# Altium PCB PCB1.PcbDoc
Units mil, origin at the board's own origin, x right, y up, seen from the top; angles counter-clockwise.
Board outline 1385 x 836.9 mil, 2 copper layers (Top Layer, Bottom Layer); 22 components, 18 nets, 80 pads, 80 vias.
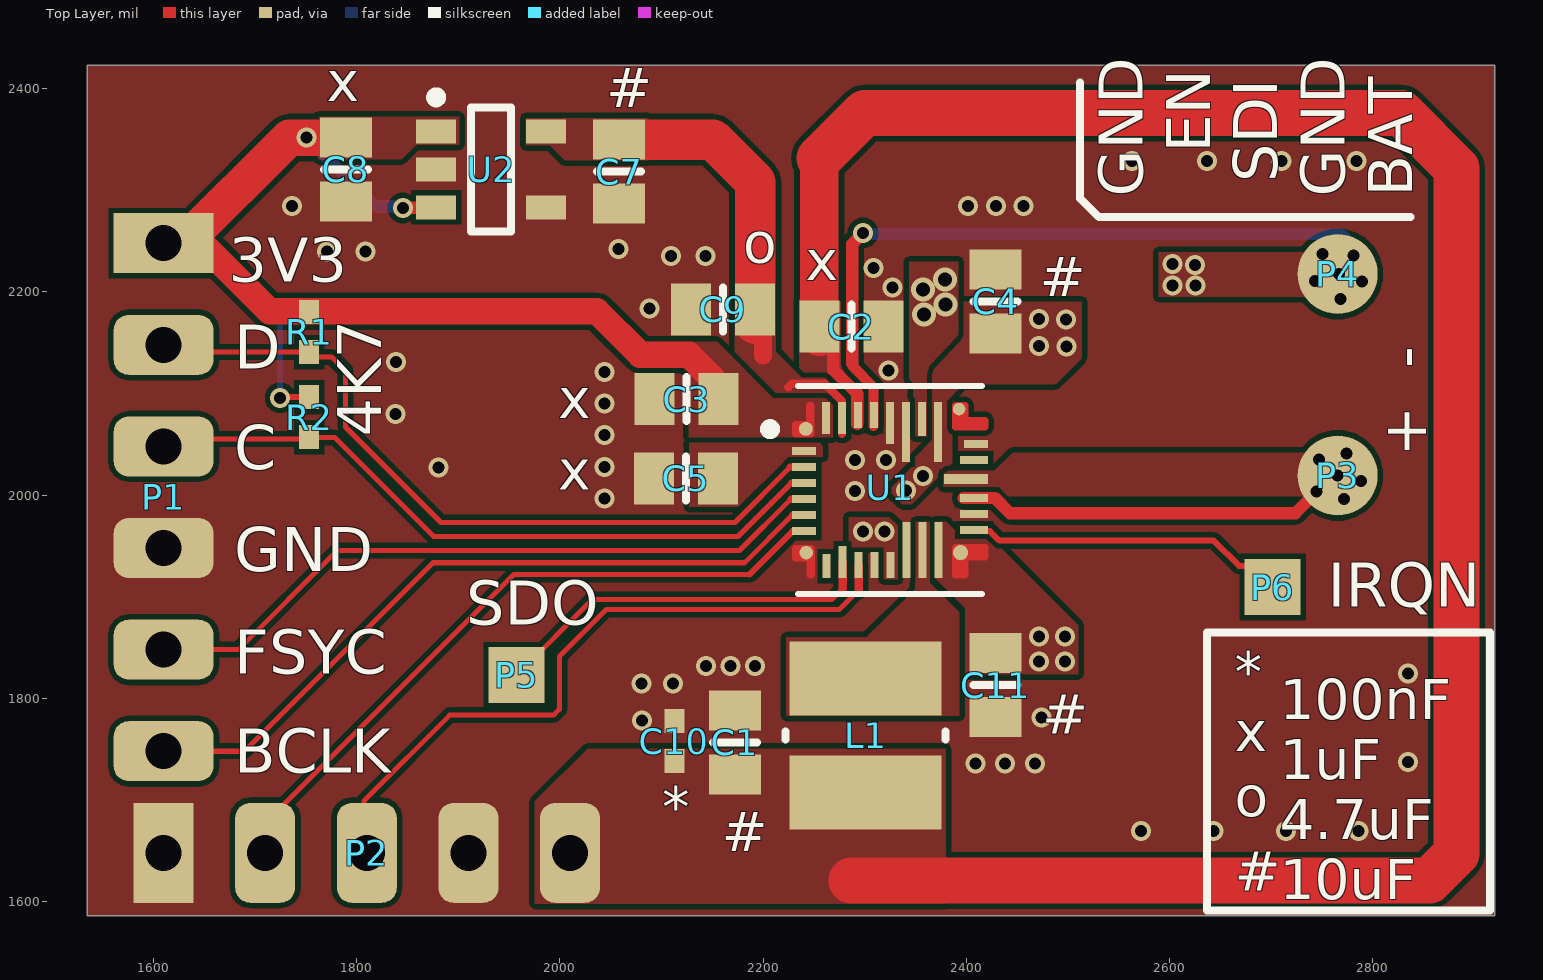
[diagram p0: Top Layer view]
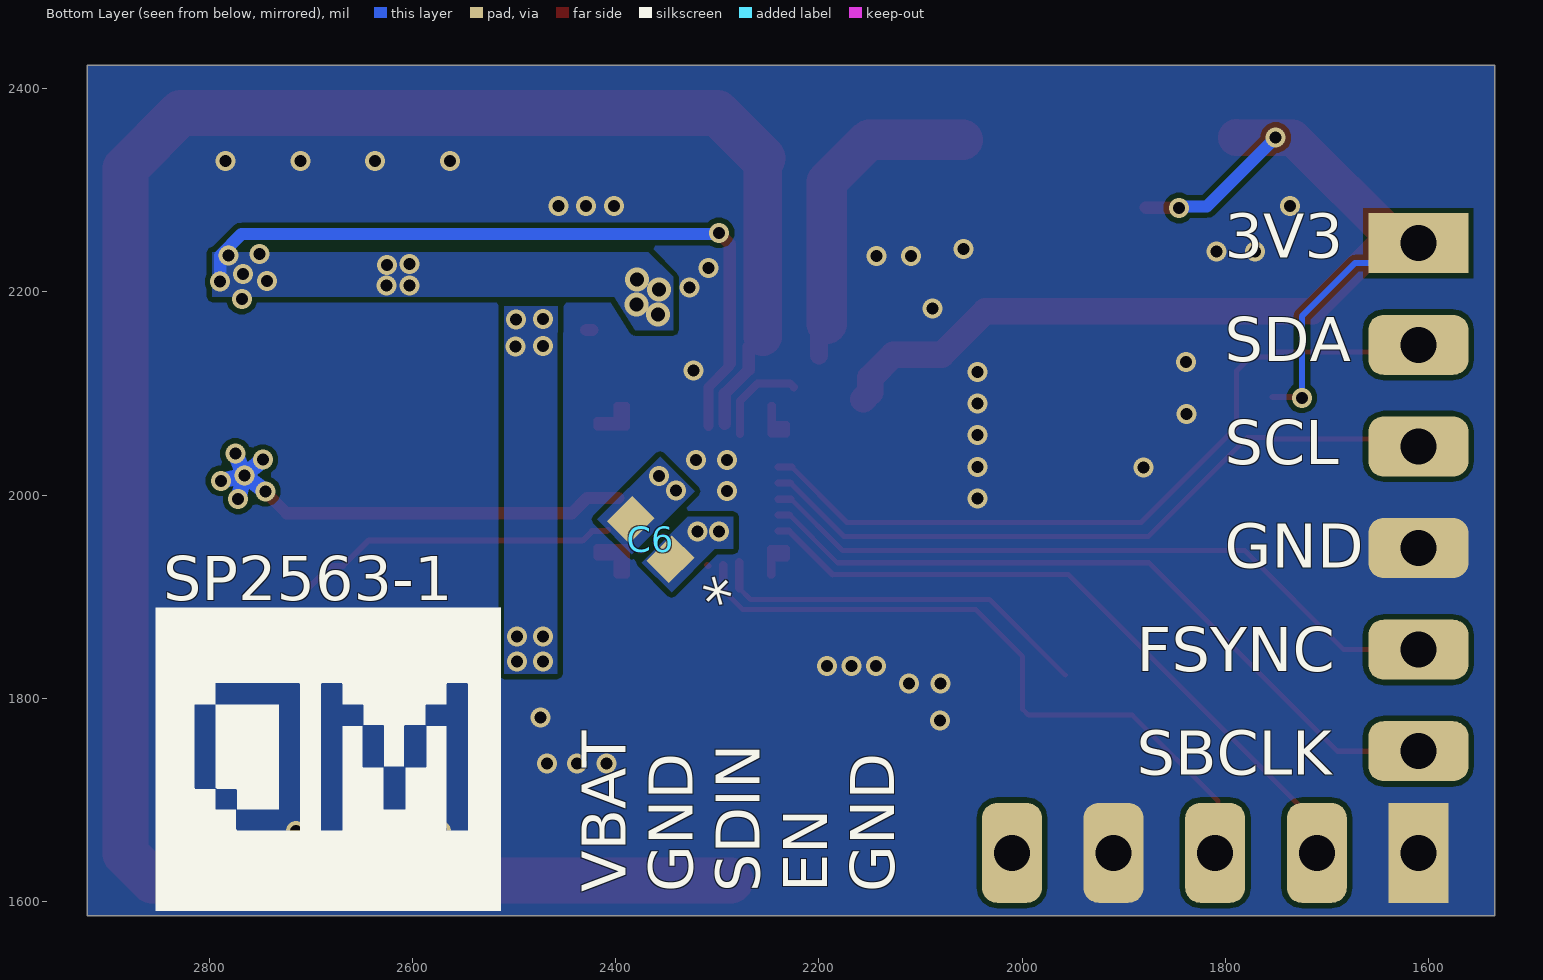
[diagram p1: Bottom Layer view, seen from below]

## Layer stack, top to bottom
Top Solder: solder mask 0.4, Solder Resist, Dk 3.5
Top Layer: signal copper 1.4
Dielectric 1: dielectric 12.6, FR-4, Dk 4.8
Bottom Layer: signal copper 1.4
Bottom Solder: solder mask 0.4, Solder Resist, Dk 3.5

## Board outline
1535,1586.1 2920,1586.1 2920,2423 1535,2423

## Design rules (kind name [scope] priority, off if disabled: settings)
Clearance [All] p1: gap=5 ignorepadtopadclearanceinfootprint=TRUE
PolygonConnect [All] p1: connectstyle=Direct reliefconductorwidth=10 reliefentries=4 polygonreliefangle="90 Angle" airgapwidth=10
RoutingVias [All] p1: holewidth=11.81 width=19.68 viastyle="Through Hole" minholewidth=11.81 minwidth=19.68 maxholewidth=67.36 maxwidth=393.7
SolderMaskExpansion [All] p1: expansion=4 istentingtop=FALSE
Width [All] p1: maxlimit=100 minlimit=5 preferedwidth=5
30 further rules are at their usual default settings.

## Components (designator, comment, footprint, x,y, rotation, side; value= is the part's Value field where it differs from the comment)
C1 "Cap" 6-0805_L 2172.2,1756.8 r270 top value=10uF
C2 "Cap" 6-0805_L 2286.9,2166 r0 top value=1uF
C3 "Cap" 6-0805_L 2124.7,2094.6 r180 top value=1uF
C4 "Cap" 6-0805_L 2429,2190.8 r270 top value=10uF
C5 "Cap" 6-0805_L 2124.1,2016.6 r0 top value=1uF
C6 "Cap" 1608[0603] 2365.7,1956.4 r45 bottom value=100nF
C7 "Cap" 6-0805_L 2058.4,2318.5 r90 top value=10uF
C8 "Cap" 6-0805_L 1789.4,2320.7 r90 top value=1uF
C9 "close to vdd" 6-0805_L 2160.5,2182.8 r0 top value=4.7uF
C10 "close to industor" 0402 2112.6,1757.9 r90 top value=100nF
C11 "close to VBST" 6-0805_L 2429,1813 r270 top value=10uF
L1 "Inductor" 4040X20L 2301,1763.3 r90 top value=1uH
P1 "Header 6" DIP6-HOLE 1611,2047 r0 top
P2 "Header 5" DIP5-HOLE 1814,1650 r90 top
P3 "Point" Point 2765.6,2019.4 r0 top
P4 "Point" Point 2765.6,2217.7 r0 top
P5 "Point" Point-min 1958.09,1822.7 r0 top
P6 "Point" Point-min 2702.1,1909.4 r0 top
R1 "Res1" 0402 1753.3,2160.5 r270 top value=1K
R2 "Res1" 0402 1753.3,2076.8 r270 top value=1K
U1 "PTAS2563RPPT" RPP0032B-MFG 2325,2005 r0 top
U2 "TPS70918" SOT23-5 1932.4,2320.7 r0 top

## Footprints (in the part's own frame and the unit in brackets; to place one, negate y for a bottom-side part, rotate by r counter-clockwise, add the part's x,y. Pads: shape width x height; smd on the part's side, far side on the other; paste and mask are expansions set on the pad)
6-0805_L [mm] "Chip Resistor, Body 2.0x1.2mm, IPC High Density"
  rect 1x1.3 smd: 1(-0.8,0) 2(0.8,0)
  silkscreen extent 0,-0.55 0,0.55, body extent -1.07,-0.7 1.07,0.7, height 0.7
0402 [mm] "Chip Capacitor, Body 1.0x0.5mm, IPC High Density"
  rect 0.6x0.5 smd: 1(-0.5,0) 2(0.5,0)
  body extent -0.55,-0.3 0.55,0.3, height 1.3
1608[0603] [mm] "Chip Capacitor, Body 1.6x0.8mm, IPC High Density"
  rect 0.8x0.9 smd: 1(-0.7,0) 2(0.7,0)
  body extent -0.87,-0.47 0.87,0.47, height 1.3
4040X20L [mm] "Precision Wire Wound Inductor, 2-Leads, Body 4.00x4.00mm, IPC High Density"
  rect 1.85x3.8 smd: 1(-1.425,0) 2(1.425,0)
  silkscreen extent -0.1,-2 0.1,2, body extent -2,-2 2,2, height 2
DIP5-HOLE [mm]
  rect 2.5x1.5 hole 0.9: 1(-0.051,5.182)
  rrect50% 2.5x1.5 hole 0.9: 2(-0.051,2.642) 3(-0.051,0.102) 4(-0.051,-2.438) 5(-0.051,-4.978)
DIP6-HOLE [mm] "Connector; Header; 11 Position"
  rect 2.5x1.5 hole 0.9: 1(-0.025,5.105)
  rrect50% 2.5x1.5 hole 0.9: 2(-0.025,2.565) 3(-0.025,0.025) 4(-0.025,-2.515) 5(-0.025,-5.055) 6(-0.025,-7.595)
Point [mm]
  round 2 smd: 1(0,0)
Point-min [mm]
  rect 1.4x1.4 smd: 1(-0.015,0.005)
RPP0032B-MFG [mm]
  round 0.349 smd paste-0.162 mask+0: 1(-2.106,1.532)
  rect 0.6x0.2 smd paste+0 mask+0: 2(-2.15,0.976) 3(-2.15,0.576) 4(-2.15,0.176) 5(-2.15,-0.224) 6(-2.15,-0.624) 7(-2.15,-1.024) 23(2.15,1.15)
  rect 0.2x1.5 smd paste+0 mask+0: 3(1.2,1.45) 27(0.4,1.45)
  round 0.339 smd paste-0.157 mask+0: 8(-2.096,-1.562)
  rect 0.2x0.6 smd paste+0 mask+0: 9(-1.583,-1.9)
  rect 0.2x0.8 smd paste+0 mask+0: 10(-1.183,-1.8) 31(-1.2,1.8) 32(-1.6,1.8)
  rect 0.2x0.65 smd paste+0 mask+0: 11(-0.783,-1.875) 12(-0.383,-1.875) 13(0.017,-1.875) 29(-0.4,1.875) 30(-0.8,1.875)
  rect 0.2x1.4 smd paste+0 mask+0: 14(0.417,-1.5) 15(0.817,-1.5) 16(1.217,-1.5)
  round 0.383 smd paste-0.179 mask+0: 17(1.763,-1.562)
  rect 0.7x0.2 smd paste+0 mask+0: 18(2.1,-1) 19(2.1,-0.6) 20(2.1,-0.2) 22(2.1,0.75)
  rect 1.1x0.25 smd paste+0 mask+0: 21(1.9,0.275)
  round 0.315 smd paste-0.145 mask+0: 24(1.725,2.025)
  rect 0.2x0.85 smd paste+0 mask+0: 26(0.8,1.775)
  rect 0.2x1.05 smd paste+0 mask+0: 28(0,1.675)
  Top Layer region: 1.55,1.55 1.55,2.15 1.6,2.2 1.9,2.2 1.95,2.15 1.95,1.825 2.4,1.825 2.45,1.775 2.45,1.55 2.4,1.5 1.6,1.5
  Top Layer region: 1.55,-1.4 1.55,-2.15 1.6,-2.2 1.9,-2.2 1.95,-2.15 1.95,-1.75 2.4,-1.75 2.45,-1.7 2.45,-1.4 2.4,-1.35 1.6,-1.35
  Top Layer region: -1.883,-1.424 -1.883,-2.15 -1.933,-2.2 -2.033,-2.2 -2.083,-2.15 -2.083,-1.774 -2.4,-1.774 -2.45,-1.724 -2.45,-1.424 -2.4,-1.374 -1.933,-1.374
  Top Layer region: -1.9,1.376 -1.9,2.15 -1.95,2.2 -2.05,2.2 -2.1,2.15 -2.1,1.726 -2.4,1.726 -2.45,1.676 -2.45,1.376 -2.4,1.326 -1.95,1.326
  silkscreen extent -3.12,-2.6 2.3,2.6, body extent 0,0 0.25,0.25, height 0.25
SOT23-5 [mm] "SOT23, 5-Leads, Body 2.90x2.80mm, Pitch 0.95mm, IPC Medium Density"
  rect 1x0.6 smd: 1(-1.375,0.95) 2(-1.375,0) 3(-1.375,-0.95) 4(1.375,-0.95) 5(1.375,0.95)
  silkscreen extent -1.5,-1.55 0.5,1.92, body extent -0.88,-1.52 0.87,1.53, height 1.1

## Part data
C1 C2 C3 C4 C5 C6 C7 C8: "Capacitor", LatestRevisionDate=17-Jul-2002, LatestRevisionNote="Re-released for DXP Platform.", PackageDescription="Radial Cap, Thru-Hole; 2 Leads; 0.3 in Pin Spacing", PackageReference=RAD-0.3, Published=8-Jun-2000, Publisher="Altium Limited"
C9 C10 C11: library part Cap, "Capacitor", LatestRevisionDate=17-Jul-2002, LatestRevisionNote="Re-released for DXP Platform.", PackageDescription="Radial Cap, Thru-Hole; 2 Leads; 0.3 in Pin Spacing", PackageReference=RAD-0.3, Published=8-Jun-2000, Publisher="Altium Limited"
P1: "Header, 6-Pin", LatestRevisionDate=17-Jul-2002, LatestRevisionNote="Re-released for DXP Platform.", Publisher="Altium Limited"
P2: "Header, 5-Pin", LatestRevisionDate=17-Jul-2002, LatestRevisionNote="Re-released for DXP Platform.", Publisher="Altium Limited"
R1 R2: "Resistor", LatestRevisionDate=17-Jul-2002, LatestRevisionNote="Re-released for DXP Platform.", PackageDescription="Axial Device, Thru-Hole; 2 Leads; 0.3 in Pin Spacing", PackageReference=AXIAL-0.3, Published=8-Jun-2000, Publisher="Altium Limited"
U1: "No Description Available", Mfr_Name="Texas Instruments", Copyright="Copyright (C) 2023 Ultra Librarian. All rights reserved.", Manufacturer_Part_Number=PTAS2563RPPT, RefDes=RefDes, Type=DEV
L1: Code_IEC=1005, Code_JEITA=0402, LatestRevisionDate=29-May-2009, LatestRevisionNote="IPC-7351 Footprint Added.", PackageDescription="Chip Inductor", PackageReference=0402-A, Published=8-Jun-2000, Publisher="Altium Limited"

## Via types
v1: diameter 19.68, hole 11.81, Top Layer to Bottom Layer, 68 vias
v2: diameter 19.68, hole 11.81, Top Layer to Bottom Layer, tented both sides, 8 vias
v3: diameter 23.62, hole 13.78, Top Layer to Bottom Layer, 4 vias

## Nets (pads, with @x,y where several pads share a name; then routed paths per layer and width w, separated by ;. In a path a pad name is that pad's centre, name@x,y a point inside that pad or via, vN(x,y) a via of type N, cw(c..) or ccw(c..) an arc to the next point about the centre after c; other vN are vias at no path point)
1V8: C7.2 C9.2 U1.31 U2.5 | length 427.3
  Top Layer w8: 2224.8,2106.2 2228.5,2109.9 2260.39,2109.9 2277.69,2092.59 2277.69,2060.1
  Top Layer w16: C9.2@2194.04,2162.96 2199.88,2157.11
  Top Layer w18: C9.2@2192.4,2168.8 2199.88,2161.31 2199.88,2157.11 2199.88,2137.69
  Top Layer w40: C7.2 2150.6,2350 2192.4,2308.2 C9.2@2192.4,2168.8
FSYNC: P1.5 U1.5 | length 693.7
  Top Layer w5: P1.5 1683.4,1848 1780.9,1945.5 2176.8,1945.5 2227.25,1995.95 2227.61,1995.95 ; U1.5@2238.92,1994.74 U1.5
  Top Layer w7: 2227.61,1995.95 2240.13,1995.95 U1.5@2240.31,1996.13
GND: C1.1 C2.2 C3.2 C4.1 C5.1 C7.1 C8.1 C9.1 C10.2 C11.2 P1.4 P2.1 P2.4 U1.8 U1.12 U1.14 U1.19 U1.23 U1.27 U1.28 U2.2 U2.4 | length 1.3
  Top Layer w6: U1.12@2308.98,1930.24 U1.12
  other v1: 2572.11,1669.5 2643.41,1669.5 2714.7,1669.5 2786,1669.5 2408.9,1735.8 2438.2,1735.8 2467.5,1735.8 2834.95,1737.56 2080.65,1778.05 2474.1,1781.3 2080.35,1814.75 2111.55,1814.75 2834.95,1824.56 2143.85,1831.65 2167.92,1831.65 2191.98,1831.65 2043.9,1996.71 1880.55,2027.26 2043.9,2027.9 2043.9,2059.09 1838.35,2079.96 2043.9,2090.27 2043.9,2121.46 2323.6,2122.5 1838.95,2130.96 2088,2183.7 2327.4,2204.5 2308.7,2223.5 2109.3,2235.2 2143.5,2235.2 1770.7,2239.9 1808.5,2239.9 2057.9,2242.3 1736.3,2284.8 2401.9,2284.8 2429.2,2284.8 2456.5,2284.8 2563.07,2328.97 2636.77,2328.97 2710.47,2328.97 2784.17,2328.97
  other v2: 2290.6,2003.9 2290.6,2034.7 2320.8,2034.7
IOVDD: C3.1 C8.2 P1.1 R1.1 R2.1 U1.1 U1.32 U2.1 U2.3 | length 1216.7
  Top Layer w6: v1(1724.7,2095.9) 1725.29,2096.49 R2.1
  Top Layer w12: v1(1845.6,2282.7) 1845.9,2283 1877.97,2283 U2.3
  Top Layer w26: P1.1@1647.34,2248 1714.21,2181.13 2036.27,2181.13 2079.21,2138.19 2126.79,2138.19 2149.51,2115.47 2149.51,2101.29 C3.1
  Top Layer w36: P1.1 1629.68,2248 1733.68,2352 1789.2,2352 C8.2
  Bottom Layer w6: P1.1 1629.4,2228.6 1672.1,2228.6 1724.7,2176 v1(1724.7,2095.9)
  Bottom Layer w12: v2(1750.4,2352) 1818.23,2284.17 1844.13,2284.17 v1(1845.6,2282.7)
  Bottom Layer w45: P1.1 P1.1@1612.2,2250.2
NetC5_2: C5.2 U1.2
NetC6_1: C6.1 U1.13 | length 2.6
  Top Layer w12: v2(2319.5,1964.1) v2@2320.97,1962.63
  Top Layer w16: v2@2298.4,1964.5 v2@2298.6,1964.3 ; v2@2319.3,1964.3 v2(2319.5,1964.1)
  other v2: 2298.4,1964.1
NetL1_2: L1.2 U1.15
NetP3_1: P3.1 U1.20 U1.21 | length 481.5
  Top Layer w12: U1.20@2397.3,1997.13 U1.20 2428.17,1997.13 2443.1,1982.2 2723.8,1982.2 P3.1@2743.6,2002
  Bottom Layer w16: v1(2744.87,2003.81) v1(2765.6,2019.4) ; v1(2747.3,2035) v1(2765.6,2019.4) ; v1(2771.57,1996.21) v1(2765.6,2019.4) ; v1(2774.3,2041) v1(2765.6,2019.4) ; v1(2788.6,2014.2) v1(2765.6,2019.4)
NetP4_1: P4.1 U1.26 U1.29 | length 731
  Top Layer w10: 2287.71,2129.57 2288.71,2128.57 2288.71,2126.37 2308.69,2106.39 U1.29@2308.69,2068.3
  Top Layer w12: 2287.71,2129.57 2287.71,2247.33 2298.4,2258.02 v1(2298.4,2258.2) ; v1(2602.9,2227.5) v1@2602.9,2229.58
  Bottom Layer w12: v1(2298.4,2258.2) 2299.54,2257.06 2768.24,2257.06 2789.3,2236 v1(2789.3,2210.2)
  other v1: 2768.1,2193 2603.2,2206.5 2625.7,2206.5 2743.3,2210.6 2766.8,2217.7 2624.9,2226.5 2781.3,2236 2750.5,2237.4
  other v3: 2358.2,2178 2379.7,2187.9 2357.2,2202.7 2378.9,2212.3
NetP6_1: P6.1 U1.18 | length 317
  Top Layer w6: U1.18 2408.61,1964.69 2423.21,1964.69 2432.6,1955.3 2643.54,1955.3 2668.47,1930.37 2680.74,1930.37 P6.1
PVDD: C4.2 C6.2 C11.1 U1.3@2372.24,2062.09 U1.16 U1.17 | length 9.5
  Top Layer w12: C4.2@2423.09,2162.5 C4.2@2429,2162.5 ; v1@2469.4,2176 2471.6,2173.8 v1(2471.6,2173.3)
  other v1: 2471.6,1836.1 2497.1,1836.1 2471.6,1861.1 2497.1,1861.1 2498.5,2146.36 2471.7,2146.76 2498.2,2172.76
  other v2: 2340.9,2004.5 2357.6,2018.9
SBCLK: P1.6 U1.6 | length 726.6
  Top Layer w5: P1.6 1689.6,1748 1875.1,1933.5 2181.9,1933.5 U1.6@2228.83,1980.43
  Top Layer w7: U1.6@2228.83,1980.43 U1.6
SCL: P1.3 R2.2 U1.4 | length 696.5
  Top Layer w5: P1.3 1617.42,2055.42 R2.2@1754.2,2055.42 ; R2.2@1753.3,2056.69 1778.52,2056.69 1875.9,1959.3 2175.4,1959.3 2228.03,2011.93
  Top Layer w7: 2228.03,2011.93 U1.4
SDA: P1.2 R1.2 U1.3@2240.35,2027.68 | length 752.8
  Top Layer w5: P1.2 1617.19,2140.81 R1.2 ; R1.2@1756.1,2136.05 1775.35,2136.05 1789.1,2122.3 1789.1,2067.2 1883.1,1973.2 2172.3,1973.2 2226.78,2027.68
  Top Layer w7: 2226.78,2027.68 U1.3@2240.35,2027.68
SDIN: P2.3 U1.11 | length 680.1
  Top Layer w5: P2.3@1807,1647 1807.3,1647.3 1807.3,1699.2 1891.6,1783.5 1993.7,1783.5 1999.5,1789.3 1999.5,1841.3 2045.6,1887.4 2274.9,1887.4 2294.17,1906.67
  Top Layer w8: 2294.17,1906.67 U1.11
SDOUT: P5.1 U1.10 | length 382
  Top Layer w5: P5.1 2032,1897.4 2267.36,1897.4 2278.43,1908.47
  Top Layer w8: 2278.43,1908.47 U1.10
SHUDOWN: P2.2 U1.7 | length 680.9
  Top Layer w5: P2.2@1707,1647 1707,1673.32 1728.75,1695.07 1728.75,1695.95 1954.9,1922.1 2186.8,1922.1
  Top Layer w6: 2186.8,1922.1 U1.7@2229.38,1964.68
  Top Layer w7: U1.7@2229.38,1964.68 U1.7
VBAT: C1.2 C2.1 C10.1 L1.1 P2.5 U1.30 | length 2228.5
  Top Layer w12: C2.1@2255.4,2156.1 2259.4,2156.1 2269.09,2146.41 2269.09,2123.36 2292.69,2099.76 U1.30@2292.69,2070.2
  Top Layer w38: C2.1@2255.4,2156.1 2255.4,2331.6
  Top Layer w45: 2255.4,2331.6 2300.01,2376.2 2828.1,2376.2 2882.5,2321.8 2882.5,1647.16 2856.14,1620.8 2286.8,1620.8
pads on no net: U1.9 U1.22 U1.24

## Polygon pours and split planes (outlines as drawn)
GND on Top Layer "l" (solid, remove dead copper, pour order 63): 1535,2423 1535,1586.1 2920,1586.1 2920,2423
NetP4_1 on Top Layer "l" (solid, pour order 5): 2363.2,2058 2347.7,2058 2347.7,2110.2 2343.7,2114.2 2343.7,2229.7 2392,2229.7 2392,2157.46 2363.2,2127.05
PVDD on Top Layer "l" (solid, remove dead copper, pour order 61): 2366.7,2067.8 2380.61,2067.8 2380.61,2092.71 2397,2109.1 2488,2109.1 2513.6,2134.7 2513.6,2190.4 2392,2190.4 2392,2155.85 2366.7,2125.34
NetC6_1 on Top Layer "l" (solid, remove dead copper, pour order 56): 2284.4,1978.5 2324.4,1978.5 2335.4,1967.5 2335.4,1917.1 2284.4,1917.1
VBAT on Top Layer "l" (solid, remove dead copper, pour order 52): 1975.5,1698.7 2027.3,1750.5 2379.6,1750.5 2379.6,1598.1 1975.5,1598.1
VBAT on Top Layer "l" (solid, remove dead copper, pour order 51): 2235.8,2192.9 2274,2192.9 2280.89,2186.01 2280.89,2111.56 2242.04,2111.56 2235.8,2117.8 2235.8,2140.1
1V8 on Top Layer "l" (solid, remove dead copper, pour order 50): 2172.2,2168.8 2212.3,2168.8 2212.3,2141.3 2238,2115.6 2269.04,2115.6 2269.04,2095.6 2210,2095.6 2172.2,2133.4 2172.2,2149.7
PVDD on Top Layer "l" (solid, remove dead copper, pour order 49): 2364.6,1973.8 2380.4,1973.8 2397.5,1956.7 2425.4,1956.7 2510.2,1871.9 2510.2,1824 2398.9,1824 2398.9,1888.5 2364.7,1922.7 2364.7,1935.4
NetL1_2 on Top Layer "l" (solid, remove dead copper, pour order 48): 2349.9,1973.8 2364.6,1973.8 2364.6,1913.4 2393.3,1884.7 2393.3,1782.9 2223,1782.9 2223,1860 2301.45,1860 2349.9,1907.19
1V8 on Top Layer "l" (solid, remove dead copper, pour order 43): 1966.6,2371.2 2086.8,2371.2 2086.8,2329.7 2004.6,2329.7 1989.9,2344.4 1966.6,2344.4
IOVDD on Top Layer "l" (solid, remove dead copper, pour order 42): 1762.6,2372.3 1900.8,2372.3 1900.8,2345 1858.6,2345 1844.4,2330.8 1762.6,2330.8
PVDD on Top Layer "l" (solid, remove dead copper, pour order 37): 2366.7,2067.8 2386.3,2067.8 2386.3,2031.2 2346.4,1991.3 2336.8,1991.3 2326.7,2001.4 2326.7,2007.9 2349.7,2030.9 2349.7,2037.4 2366.7,2054.4
NetP3_1 on Top Layer "l" (solid, remove dead copper, pour order 9): 2377.5,2008.1 2377.5,2024 2427.7,2024 2445.7,2042 2794.2,2042 2794.2,1998.9 2441,1998.9 2431.8,2008.1
NetC5_2 on Top Layer "l" (solid, remove dead copper, pour order 12): 2127.1,2051.6 2188.5,2051.6 2255.7,2051.6 2258.9,2048.4 2258.9,2037.6 2224.7,2037.6 2175.5,1988.4 2127.1,1988.4
IOVDD on Top Layer "l" (solid, remove dead copper, pour order 11): 2268.9,2057.1 2268.9,2090 2263.3,2095.6 2210,2095.6 2154.8,2150.8 2126.9,2150.8 2126.9,2057.2 2197,2057.2 2230.51,2057.2
NetP4_1 on Top Layer "l" (solid, remove dead copper, pour order 8): 2589.3,2239.3 2589.3,2195.2 2796.4,2195.2 2796.4,2239.3
GND on Bottom Layer "l" (solid, remove dead copper, pour order 62): 1535,2423 1535,1586.1 2920,1586.1 2920,2423
NetC6_1 on Bottom Layer "l" (solid, remove dead copper, pour order 54): 2374.2,1933.7 2329.3,1978.6 2284.4,1978.6 2284.4,1947.1 2302.5,1947.1 2345.05,1904.55
PVDD on Bottom Layer "l" (solid, remove dead copper, pour order 53): 2418.1,1976.1 2356.4,2037.8 2322.35,2003.75 2384.05,1942.05
NetP4_1 on Bottom Layer "l" (solid, remove dead copper, pour order 7): 2343.43,2162.4 2380.99,2162.4 2401.7,2195.3 2595.4,2195.3 2796.9,2195.3 2796.9,2239.3 2368.1,2239.3 2343.56,2214.76
PVDD on Bottom Layer "l" (solid, remove dead copper, pour order 4): 2456.84,2186.2 2509.7,2186.2 2509.7,1824.4 2457.36,1824.4 2457.36,2134.1

## Silkscreen, mask and mechanical layers (free items; w line width, h text height)
Top Overlay:
  lines w7.87: 2512.1,2406.1 2512.1,2292 2530.4,2273.7 2837.2,2273.7 ; 2636.8,1591.4 2636.8,1865.1 2915.5,1865.1 2915.5,1591.4 2636.8,1591.4
  text "x" at 1770.78,2387.64 h39.37
  text "#" at 2045.55,2381.77 h39.37
  text "EN" at 2639.95,2336.97 h43.31 r90
  text "SDI" at 2706.25,2308.11 h43.31 r90
  text "GND" at 2573.65,2293.68 h43.31 r90
  text "GND" at 2772.55,2293.68 h43.31 r90
  text "BAT" at 2838.85,2293.68 h43.31 r90
  text "o" at 2180.28,2228.68 h39.37
  text "x" at 2242.15,2211.76 h39.37
  text "3V3" at 1674.28,2210.08 h43.31
  text "#" at 2472.38,2195.98 h39.37
  text "D" at 1679.57,2124.55 h43.31
  text "x" at 1998.38,2075.58 h39.37
  text "4K7" at 1824.02,2057.38 h43.31 r90
  text "+  -" at 2852.82,2038.08 h43.31 r90
  text "C" at 1679.57,2025.45 h43.31
  text "x" at 1998.38,2005.28 h39.37
  text "GND" at 1679.57,1924.92 h43.31
  text "IRQN" at 2755.61,1890.06 h43.31
  text "SDO" at 1907.88,1872.38 h43.31
  text "FSYC" at 1679.57,1824.48 h43.31
  text "*" at 2664.28,1806.52 h39.37
  text "#" at 2474.78,1765.08 h39.37
  text "x" at 2664.28,1748.08 h39.37
  text "BCLK" at 1679.57,1726.72 h43.31
  text "o" at 2664.28,1684.08 h39.37
  text "*" at 2100.8,1673.9 h39.37
  text "#" at 2159.38,1649.58 h39.37
  text "#" at 2664.28,1610.58 h39.37
  text "100nF / 1uF / 4.7uF / 10uF" at 2708.6,1602.5 h39.37
Bottom Overlay:
  region: 2757.89,1793.93 2793.5,1793.93 2793.5,1711.96 2792.83,1711.96 2792.83,1711.29 2774.69,1711.29 2774.69,1711.96 2774.01,1711.96 2774.01,1711.29 2773.34,1711.29 2773.34,1710.61 2772.67,1710.61 2772.67,1691.13 2731.68,1691.13 2731.68,1793.93 2757.22,1793.93
  region: 2852.62,1591.02 2513.32,1591.02 2513.32,1889.33 2852.62,1889.33 hole: 2793.5,1814.76 2711.53,1814.76 2711.53,1814.08 2710.86,1814.08 2710.86,1670.3 2772.67,1670.3 2772.67,1670.97 2773.34,1670.97 2773.34,1675.68 2773.34,1676.35 2773.34,1691.13 2793.5,1691.13 2793.5,1711.29 2813.65,1711.29 2813.65,1711.96 2814.33,1711.96 2814.33,1793.93 2793.5,1793.93 hole: 2689.36,1814.76 2669.87,1814.76 2669.87,1814.08 2669.2,1814.08 2669.2,1793.93 2649.04,1793.93 2649.04,1793.26 2648.37,1793.26 2648.37,1773.77 2628.89,1773.77 2628.89,1773.1 2628.22,1773.1 2628.22,1732.79 2608.06,1732.79 2608.06,1773.1 2607.39,1773.1 2607.39,1773.77 2587.23,1773.77 2587.23,1793.26 2586.56,1793.26 2586.56,1793.93 2566.4,1793.93 2566.4,1814.08 2565.73,1814.08 2565.73,1814.76 2546.25,1814.76 2546.25,1814.08 2545.57,1814.08 2545.57,1670.3 2566.4,1670.3 2566.4,1773.1 2586.56,1773.1 2586.56,1732.79 2587.23,1732.79 2587.23,1732.11 2607.39,1732.11 2607.39,1691.13 2628.22,1691.13 2628.22,1732.11 2648.37,1732.11 2648.37,1732.79 2649.04,1732.79 2649.04,1773.1 2669.2,1773.1 2669.2,1670.3 2690.03,1670.3 2690.03,1814.08 2689.36,1814.08
  text "3V3" at 1800.53,2233.78 h43.31
  text "SDA" at 1800.53,2132.02 h43.31
  text "SCL" at 1800.53,2030.26 h43.31
  text "GND" at 1800.53,1928.5 h43.31
  text "SP2563-1" at 2845.14,1896.81 h43.31
  text "*" at 2331.92,1894.4 h43.31 r45
  text "FSYNC" at 1887.12,1826.74 h43.31
  text "SBCLK" at 1887.12,1724.98 h43.31
  text "GND" at 2125.68,1608.98 h43.31 r270
  text "EN" at 2191.86,1608.98 h43.31 r270
  text "SDIN" at 2258.03,1608.98 h43.31 r270
  text "GND" at 2324.21,1608.98 h43.31 r270
  text "VBAT" at 2390.39,1608.98 h43.31 r270
Mechanical 1:
  the board outline again, w7.87